# Altium PCB shkb.PcbDoc (part 3 of 3)
Units mil, origin at the board's own origin, x right, y up, seen from the top; angles counter-clockwise.
Board outline 5570.88 x 1417.33 mil, 4 copper layers (COMPONENT, GND1, GND2, SIGNAL), stack 63.78 mil thick; 142 components, 135 nets, 597 pads, 700 vias.
Unrouted connection lines stored in the file: 1.
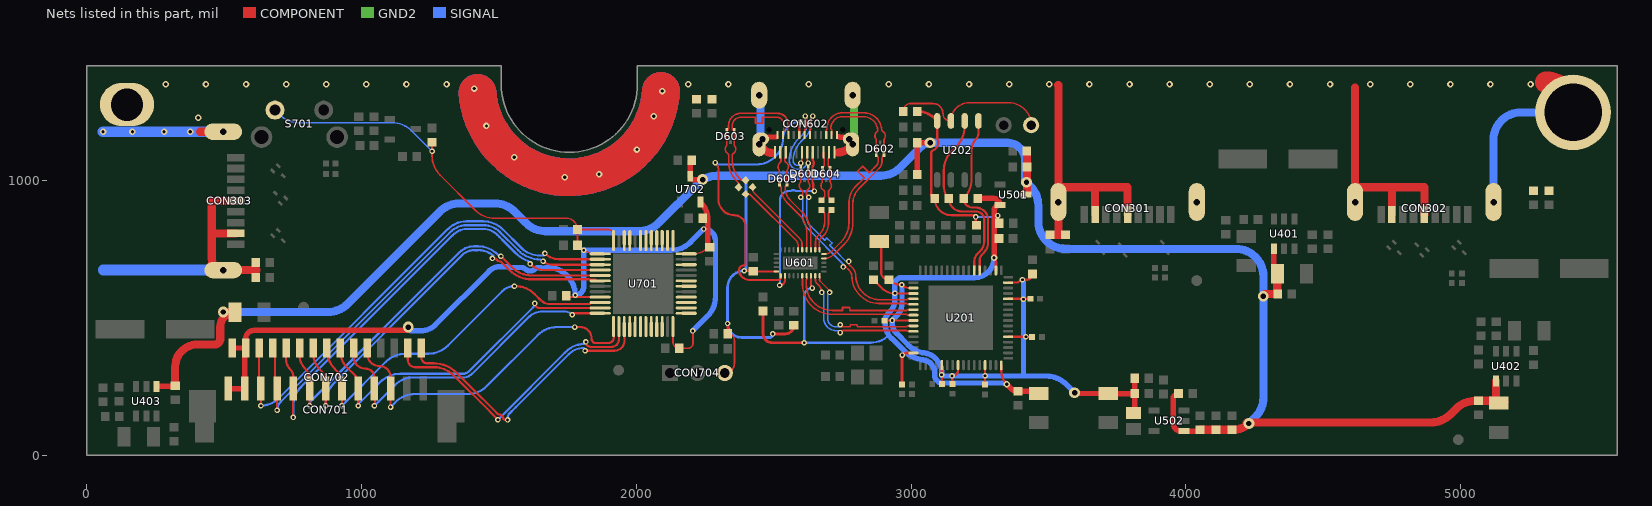
[diagram p5: the nets of this part, all layers, seen from the top]

## Via types
v1: diameter 20, hole 10, COMPONENT to SIGNAL, tented both sides, 543 vias
v2: diameter 23.62, hole 11.81, COMPONENT to SIGNAL, tented both sides, 94 vias
v3: diameter 20, hole 11.81, COMPONENT to SIGNAL, 28 vias
v4: diameter 23.62, hole 11.81, COMPONENT to SIGNAL, tented bottom, 25 vias
v5: diameter 39.37, hole 19.68, COMPONENT to SIGNAL, tented both sides, 10 vias

## Nets (pads, with @x,y where several pads share a name; then routed paths per layer and width w, separated by ;. In a path a pad name is that pad's centre, name@x,y a point inside that pad or via, vN(x,y) a via of type N, cw(c..) or ccw(c..) an arc to the next point about the centre after c; other vN are vias at no path point) (continued)
PA0: CON701.6 CON702.8 U701.10 | length 1344.9
  COMPONENT w8: CON702.8@872.49,389.76 872.49,384.93 ccw(c972.49,384.93) 901.78,314.22 903,313 cw(c841.98,251.98) 928.28,251.98 CON701.6@928.28,242 v1@928.28,181.28 ; v1(1556,615) 1559.58,615 cw(c1559.58,515) 1630.29,585.71 1653,563 ccw(c1685.02,595.02) 1685.02,549.74 1826.56,549.74 ccw(c1826.52,557.74) 1829.62,550.36 cw(c1841.83,538.14) 1841.83,555.42 U701.10@1858.51,555.42
  SIGNAL w8: v1(928.28,180) 1087.99,339.71 cw(c1158.7,269) 1158.7,369 1242.58,369 ccw(c1242.58,469) 1313.29,398.29 1511.62,596.62 cw(c1556,552.23) v1(1556,615)
PA1: CON701.5 CON702.9 U701.11 | length 1274.7
  COMPONENT w8: CON702.9@921.7,389.76 921.7,378.66 ccw(c1004.66,378.66) 946,320 973.57,292.44 cw(c941.13,260) 987,260 v1@987,176 ; v1(1630,552) ccw(c1646.26,552) 1646.26,535.74 U701.11@1858.51,535.74
  SIGNAL w8: v1@987,176 cw(c1028.04,176) 987.82,184.18 cw(c995.65,182.54) 990,188.2 1003.45,201.65 1068.51,266.71 cw(c1139.22,196) 1139.22,296 1367.86,296 ccw(c1367.86,330.14) 1392,306 1624.34,538.34 ccw(c1610.69,552) v1(1630,552)
  other v1: 987.33,180
PA2: CON701.4 CON702.10 U701.12 | length 1213.3
  COMPONENT w8: CON702.10@970.91,389.76 970.91,357.09 ccw(c1013,357.09) 1013,315 cw(c1013,281.61) 1046.39,281.61 CON701.4@1046.39,242 ; v1@1048,174 CON701.4@1048,242 ; v1(1766,511) cw(c1771.05,511) 1771.05,516.05 U701.12@1858.51,516.05
  SIGNAL w8: v1(1046.39,180) 1121.1,254.71 cw(c1191.81,184) 1171.13,281.84 cw(c1172.73,274) 1172.69,282 1367.86,282 ccw(c1367.86,330.14) 1401.95,296.15 1606.4,500.6 ; v1@1048,174 v1@1050.19,176.19 ; 1606.43,500.63 cw(c1660.48,446.52) 1660.48,523 1737.03,523 cw(c1737.03,482.03) v1(1766,511)
PA3: CON701.3 CON702.11 U701.13 | length 1260.2
  COMPONENT w8: CON702.11@1020.13,389.76 1020.13,368.87 ccw(c1065,368.87) 1065,324 cw(c1065,283.56) 1105.44,283.56 CON701.3@1105.44,242 1105,242 v1(1105,175) ; v1(1776,466) 1795,466 cw(c1795,424) 1837,424 1837,423 ccw(c1853,423) 1845.31,408.97 ccw(c1849.13,416) 1849.09,408 1897,408 ccw(c1897,429) 1918,429 1918,456.56 ccw(c1916.58,456.56) U701.13@1916.58,457.98
  SIGNAL w8: v1(1105,175) 1122.71,192.71 cw(c1193.42,122) 1193.42,222 1384.58,222 ccw(c1384.58,322) 1455.29,251.29 1640.71,436.71 cw(c1711.42,366) 1711.42,466 v1(1776,466)
PA4: CON702.14 U701.14 | length 1078.2
  COMPONENT w8: CON702.14@1167.76,389.76 1167.76,347 ccw(c1194.76,347) 1171.79,332.82 ccw(c1194.76,347) 1180.59,324.02 ccw(c1194.76,347) 1194.76,320 1263.4,320 cw(c1263.4,220) 1334.11,290.71 1381.53,243.29 1432.9,192 v1(1496,129) ; v1(1816.06,412) ccw(c1834.06,412) 1834.06,394 1910,394 ccw(c1910,420.26) 1936.26,420.26 U701.14@1936.26,457.98
  SIGNAL w8: v1(1496,129) 1739.5,372.5 1744.07,377.07 cw(c1809.09,312.04) 1809.09,404 cw(c1811.59,404) 1809.82,405.76 v1(1816.06,412)
PA5: CON702.15 U701.15 | length 1056.1
  COMPONENT w8: CON702.15@1216.98,389.76 1216.98,355.02 ccw(c1238,355.02) 1238,334 1263.4,334 cw(c1263.4,220) 1344.11,300.51 1391.4,253.22 1489.38,155.39 1493.67,151.11 ccw(c1499.29,156.81) 1498.3,148.87 cw(c1496,129) 1515.38,133.96 ccw(c1523.11,136) 1523.07,128 v1(1531,128) ; CON702.15@1216.98,401.98 cw(c1220,401.98) CON702.15@1220,405 ; v1(1813,380) 1920,380 ccw(c1920,417) 1957,417 1957,456.93 ccw(c1955.95,456.93) U701.15@1955.95,457.98
  SIGNAL w8: v1(1531,128) 1531,131.86 cw(c1565.14,131.86) 1534.76,147.43 cw(c1541.86,143.75) 1536.17,149.38 1560.9,174.1 1753.97,367.17 cw(c1809.09,312.04) 1809.09,390 1809.09,389.44 ccw(c1822.44,389.44) v1(1813,380)
PA6: U701.16
PA7: U701.17
PA9: U701.30
PA10: U701.31
PA15: U701.38
PB0: U701.18
PB1: U701.19
PB2: U701.20
PB3: U701.39
PB4: U701.40
PB5: U701.41
PB6: U701.42
PB7: U701.43
PB8: U701.45
PB9: U701.46
PB10: U701.21
PB11: U701.22
PB12: U701.25
PB13: U701.26
PB14: U701.27
PB15: U701.28
PC13: CON701.11 CON702.3 U701.2 | length 1751.8
  COMPONENT w8: CON702.3@626.43,389.76 626.43,257.87 ccw(c648.87,257.87) 633,242 v1(633,180) ; v1@1667,734 ccw(c1717.94,784.94) 1717.94,712.9 U701.2@1858.51,712.9
  SIGNAL w8: v1(633,180) ccw(c633,271.74) 656.06,182.94 ccw(c633,271.74) 697.87,206.87 1314.42,823.42 cw(c1381,756.85) 1381,851 1442.58,851 cw(c1442.58,751) 1513.29,821.71 1579.71,755.29 ccw(c1650.42,826) 1650.42,726 v1@1663,726
  other v1: 1667,734
PC14: CON701.10 CON702.4 U701.3 | length 1719.3
  COMPONENT w8: CON702.4@675.64,389.76 cw(c655.62,369.74) 683.93,369.74 683.93,254.92 ccw(c716.33,266.28) CON701.10@692.06,242 v1(692.06,162.94) ; v1(1660,706) ccw(c1690.86,736.86) 1690.86,693.22 U701.3@1858.51,693.22
  SIGNAL w8: v1(692.06,162.94) cw(c736.26,162.94) 705,194.2 1320.51,809.71 cw(c1391.22,739) 1363.06,834.95 cw(c1365.27,827.27) 1363.51,835.07 cw(c1381,756.85) 1381,837 1442.58,837 cw(c1442.58,751) 1503.51,811.7 1569.73,745.47 ccw(c1650.42,826) 1650.42,712
PC15: CON701.9 CON702.5 U701.4 | length 1731.8
  COMPONENT w8: CON702.5@724.85,389.76 724.85,348.57 ccw(c776.57,348.57) 740,312 cw(c713.18,285.18) 750.28,293.05 cw(c713.18,285.18) 751.11,285.18 CON701.9@751.11,242 ; v1@750.28,139.72 CON701.9@750.28,242 ; v1(1613,696) ccw(c1667.25,750.25) 1667.25,673.53 U701.4@1858.51,673.53
  SIGNAL w8: v1(751.11,137) 751.11,179.09 cw(c851.11,179.09) 780.4,249.8 951.3,420.7 1330.36,799.77 cw(c1391.22,739) 1366.5,821.37 cw(c1368.77,813.7) 1367.06,821.52 cw(c1381,756.85) 1381,823 1442.58,823 cw(c1442.58,751) 1493.68,801.72 1500.72,794.68 1518.16,777.24 cw(c1512.52,771.57) 1518.2,777.2 1559.86,735.55 ccw(c1650.42,826) 1606.44,705.79
PF0: CON701.8 CON702.6 U701.5 | length 1540.2
  COMPONENT w8: CON702.6@774.06,389.76 774.06,361.72 ccw(c838.72,361.72) 775.81,346.77 ccw(c838.72,361.72) 793,316 cw(c751.56,274.56) 810.17,274.56 CON701.8@810.17,242 v1@810.17,180 ; v1(1507,724) 1547.86,683.14 ccw(c1618.58,753.85) 1618.58,653.85 U701.5@1858.51,653.85
  SIGNAL w8: v1(810.16,180) cw(c839.53,180) 818.77,200.77 1356.08,738.08 cw(c1409,685.16) 1409,760 1423.58,760 cw(c1423.58,660) 1494.29,730.71 v1@1499,726 ; v1@816,177 v1@816,180
PF1: CON701.7 CON702.7 U701.6 | length 1512.8
  COMPONENT w8: CON702.7@823.28,389.76 823.28,372.1 ccw(c911.1,372.1) 849,310 cw(c800.18,261.18) 869.22,261.18 CON701.7@869.22,242 v1(869.22,180) ; v1(1476,716) cw(c1476,669.64) 1486.63,714.77 cw(c1484.76,706.99) 1491.1,711.87 ccw(c1507,724) 1507.2,704 1538,673.2 ccw(c1618.58,753.85) 1618.58,639.85 1826.56,639.85 cw(c1826.52,631.85) 1829.62,639.22 ccw(c1835.87,653.85) 1835.87,637.94 1849.85,637.94 cw(c1849.85,629.94) 1852,637.64 1852,634.16 U701.6@1858.51,634.16
  SIGNAL w8: v1@869.22,173.22 v1(869.22,180) 869.22,190 cw(c969.22,190) 898.51,260.71 1076.19,438.39 1079.09,441.29 1265.9,628.1 1327.81,690.01 1365.99,728.19 cw(c1409,685.16) 1409,746 1423.58,746 cw(c1423.58,660) 1479.23,725.56
SCL: R203.1 U201.38 U202.6 | length 684.6
  COMPONENT w7.99: U202.6@3195.29,1222.13 ccw(c3254.72,1216.28) 3195,1217 ccw(c3254.72,1216.28) U202.6@3195,1216.28 3195,1195.42 cw(c3095,1195.42) 3165.71,1124.71 3148.29,1107.29 ccw(c3219,1036.58) 3119,1036.58 3119,978.88 ccw(c3182.47,978.88) 3137.59,934 ccw(c3184.59,934) 3184.59,887 3236.01,887 cw(c3236.01,857) 3245.99,885.29 cw(c3236.01,857) 3264.29,866.99 cw(c3236.01,857) 3266,857 3266,777 cw(c3218.23,777) 3252.01,743.22 3240.96,732.17 ccw(c3267.64,705.48) 3229.91,705.48 U201.38@3229.91,671.99
SDA: R202.1 U201.37 U202.5 | length 623.5
  COMPONENT w7.99: U201.37@3249.59,671.99 3249.59,708 cw(c3281,708) 3258.77,730.19 ; 3258.79,730.21 3264.79,736.21 ccw(c3228.09,772.91) 3280,772.91 3280,817
  COMPONENT w8: U202.5@3245,1216.28 3245,1170.31 cw(c3217.69,1170.31) 3237,1151 ccw(c3278.04,1109.96) 3220,1109.96 3220,1004.42 cw(c3120.99,1004.42) R202.1@3191,934.41 ccw(c3224.42,934.41) 3224.42,900.99 3232.58,900.99 3236.01,900.99 cw(c3236.01,857) 3280,857.09 cw(c3236.01,857) 3280,857 3280,837 3280,817
SHELD1: C313.2 C314.2 C315.2 C602.2 CON301.4 CON301.7 CON301.G CON302.4 CON302.7 CON302.G CON303.4 CON303.7 CON303.G CON602.A1 CON602.A12 CON602.B1 CON602.B12 CON602.G L304.2 L305.2 L306.2 L602.2 pad. | length 6763.4
  COMPONENT w19.68: CON602.G@2459.01,1150.47 cw(c2477.18,1132.3) 2477.18,1158 2508,1158
  COMPONENT w20: 2737,1158 cw(c2737,1102.49) 2776.25,1141.74 CON602.G@2787.09,1130.91
  COMPONENT w29.53: 411,1177.17 CON303.G@496.06,1177.17 ; CON303.4@541.34,807.09 454,807.09 ; CON303.7@541.34,925.2 454,925.2 454,807.09 ; 617,674 cw(c616.23,674) 616.23,673.23 CON303.G@496.06,673.23 cw(c496.06,715.29) 454,715.29 454,807.09 ; CON602.G@2446.93,1130.91 2467.11,1110.72 ccw(c2493,1136.61) 2493,1100 ; L304.2@3505,801.59 C314.2@3562,801.59 ; 3535,1347 cw(c3535,1345.98) 3536.02,1345.98 CON301.G@3536.02,975 ; 3536.02,803.63 CON301.G@3536.02,921.26 CON301.G@3536.02,975 ; CON301.4@3669.88,875.98 3669.88,975 ; CON301.7@3787.99,875.98 3787.99,975 3669.88,975 ; 4616,1338 4616.14,1337.86 CON302.G@4616.14,921.26 ; CON302.G@4616.14,975 4750,975 ; CON302.4@4750,875.98 4750,975 ; CON302.7@4868.11,875.98 4868.11,975 4750,975 ; CON302.G@5120.08,921.26 CON302.G@5120.08,928.08 ; CON301.G@3536.02,975 3669.88,975
  COMPONENT w29.68: 2734,1102 ccw(c2734,1160.38) 2775.28,1119.1 CON602.G@2787.09,1130.91
  COMPONENT w78.74: 5309.75,1357.28 cw(c5309.75,1257.28) 5409.75,1257.28 pad.@5409.75,1247.47
  COMPONENT w137.8: 1421.54,1317.88 ccw(c1755,1346) v2@2089.01,1325.31
  GND2 w29.53: CON602.G@2787.09,1310.04 cw(c2774.92,1297.87) 2792.13,1297.87 CON602.G@2792.13,1144.69
  SIGNAL w29.53: CON602.G@2451.97,1144.69 CON602.G@2451.97,1323.82 ; CON302.G@5120.08,935.04 5120.08,1147.47 cw(c5220.08,1147.47) 5220.08,1247.47 pad.@5409.75,1247.47
  SIGNAL w39.37: v2(58.5,1177.17) v2(165.5,1177.17) v2(280.5,1177.17) v2(375.5,1177.17) CON303.G@496.06,1177.17 ; 59.06,674.02 CON303.G@496.62,674.02
  SIGNAL w137.8: 1421.54,1317.88 ccw(c1755,1346) v2@2089.01,1325.31
  other v2: 1739,1011 1864,1022 1555,1084 2002,1112 1454,1198 405,1228 2063,1233 2094,1325 1410,1334 287,1350 433,1350 579,1350 725,1350 871,1350 1017,1350 1163,1350 1309,1350 2189,1350 2335,1350 2627,1350 2919,1350 3065,1350 3211,1350 3357,1350 3503,1350 3649,1350 3795,1350 3941,1350 4087,1350 4233,1350 4379,1350 4525,1350 4671,1350 4817,1350 4963,1350 5109,1350 5255,1350
SWCLK: U701.37
SWDIO: U701.34
UP_CC1: CON602.A5 U601.2 | length 647.8
  COMPONENT w8: v1(2521,618) ccw(c2521,637.88) 2540.88,637.88 U601.2@2540.88,652.76 ; CON602.A5@2641.81,1102.36 2641.81,1077.38 ccw(c2649.81,1077.38) 2642.95,1073.27 cw(c2625.79,1063) 2642.15,1051.51 ccw(c2648.7,1046.91) 2640.7,1046.91 2640.7,1042 2640.7,994.45 ccw(c2648.03,997.66) 2640.82,994.19 cw(c2611.98,980.31) 2642.23,990.77 cw(c2611.98,980.31) 2642.25,990.72 cw(c2611.98,980.31) 2643.07,972.73 ccw(c2650.84,970.84) 2643.45,967.79 ccw(c2662.94,975.94) v1@2648,961
  SIGNAL w8: v1(2521,618) ccw(c2521,620) 2523,620 2523,929 cw(c2555,929) 2555,961 2558.39,961 ccw(c2558.39,969) 2561.99,961.86 cw(c2571,944) 2576.32,963.28 cw(c2571,944) 2580.01,961.86 ccw(c2583.61,969) 2583.61,961 2605.79,961 cw(c2605.83,953) 2607.55,960.81 ; 2607.59,960.8 ccw(c2611.98,980.31) 2615.49,960.62 ; 2615.49,960.63 ccw(c2611.98,980.31) 2616.38,960.8 cw(c2618.14,953) 2618.18,961 v1(2648,961)
UP_CC2: CON602.B5 U601.1 | length 1100
  COMPONENT w8: v1@2287,1065 cw(c2258.68,1036.68) 2295,1053.56 cw(c2258.68,1036.68) 2298.73,1036.68 2298.73,930.8 ccw(c2356.54,930.8) 2356.54,873 cw(c2356.54,832.2) 2397.34,832.2 2397.34,696.48 cw(c2391.83,696.48) 2392.33,690.99 ccw(c2393,671) 2391.83,690.97 ccw(c2393,671) 2373.12,673.21 ccw(c2393,671) 2373.1,672.99 ccw(c2393,671) 2373.63,666.01 ccw(c2393,671) 2376.5,659.69 ccw(c2415,681) 2415,637 2513.58,637 ccw(c2513.58,645) 2515.67,637.28 ; 2515.7,637.29 cw(c2521,618) 2518.25,637.81 ccw(c2517.16,645.73) 2525.13,645.13 U601.1@2525.13,652.76 ; CON602.B5@2592.6,1165.35 2592.6,1200.96 cw(c2611.04,1200.96) v1@2598,1214
  SIGNAL w8: v1(2287,1065) ccw(c2294,1065) 2294,1058 2436.77,1058 ccw(c2436.77,1155.22) 2499.85,1081.24 ccw(c2436.77,1155.22) 2533.99,1155.22 cw(c2597,1150.84) 2597,1214 v1(2598,1214)
UP_D_N: CON602.A7 CON602.B7 D601.2 U201.54 | length 1095.3
  COMPONENT w6: 2598.17,1015.05 ccw(c2592.22,1015.84) 2598.22,1015.87 D601.2@2598.22,1039.74 ; D601.2@2598.22,1043.31 D601.2@2598.22,1039.74 ; v1(2598.23,1062.99) ccw(c2588.06,1073.16) 2602.44,1073.16 CON602.A7@2602.44,1102.36 ; D601.2@2599.67,1036.94 2599.18,1037.43 cw(c2601.5,1039.74) D601.2@2598.22,1039.74 ; 2605.17,946 2605.17,961.24 ccw(c2602.89,961.24) 2604.51,962.85 cw(c2611.98,980.31) 2597.89,967.57 cw(c2611.98,980.31) 2596.86,991.81 ccw(c2592.08,995.44) 2598.08,995.47 2598.08,1003.94 2598.08,1013.78 ; CON602.B7@2631.97,1165.35 2632.85,1166.23 2632.85,1183.91 ccw(c2626.53,1190.22) 2635.46,1190.22 2635.46,1191.76 2635.5,1191.79 2635.5,1219 cw(c2646.89,1219) 2638.84,1227.06 2639.32,1227.54 ccw(c2632.85,1234.01) v1(2642,1234.01) ; v1(2753,685) 2763.1,685 2773.05,675.05 cw(c2744.2,646.2) 2785,646.2 ccw(c2869.18,646.2) 2809.64,586.69 ; 2809.66,586.67 2818.86,577.47 ccw(c2880.82,639.42) 2818.96,577.37 ccw(c2880.82,639.42) 2880.69,551.81 ccw(c2880.82,639.42) 2880.82,551.8 2983.91,551.81 2986.75,548.96 U201.54@3008.45,548.96 ; 2598.08,1013.78 cw(c2607.08,1013.78) 2598.16,1015.01 ccw(c2607.08,1013.78) 2598.08,1013.78
  SIGNAL w6: v1(2598,939) cw(c2598,931.5) 2605.5,931.5 2605.5,869.49 ccw(c2670.41,869.49) 2624.48,823.62 2753,695.1 v1(2753,685) ; v1(2598.23,1062.99) cw(c2589.08,1062.99) 2595.55,1056.52 cw(c2591.3,1060.76) 2591.3,1054.76 2586.65,1054.76 cw(c2586.65,1070.42) 2571,1070.42 2571,1071.58 cw(c2671,1071.58) 2600.29,1142.29 2614.78,1156.78 ccw(c2564.77,1206.8) 2635.5,1206.8 2635.5,1218.32 cw(c2657.69,1218.32) v1@2642,1234.01
UP_D_P: CON602.A6 CON602.B6 D601.1 U201.53 | length 1171.8
  COMPONENT w6: CON602.B6@2612.28,1165.35 2612.28,1183.03 cw(c2617.14,1183.03) 2613.7,1186.46 2617.14,1189.89 2617.27,1189.89 ccw(c2607.07,1200.09) 2621.5,1200.09 2621.5,1219 ccw(c2610.13,1219) 2618.17,1227.04 2617.68,1227.53 cw(c2624.15,1234) v1(2615,1234) ; 2619.17,946 2619.17,961.4 cw(c2621.45,961.4) 2619.84,963.02 ccw(c2611.98,980.31) 2626.11,967.6 ccw(c2611.98,980.31) 2627.14,991.78 cw(c2631.92,995.4) 2625.92,995.4 2625.92,1003.94 2625.92,1013.78 ccw(c2616.92,1013.78) 2625.84,1015.01 ; CON602.A6@2622.13,1102.36 2622.13,1071.84 ccw(c2634.63,1071.84) v1(2625.79,1063) ; D601.1@2624.33,1036.94 2624.82,1037.43 ccw(c2622.5,1039.74) 2625.78,1039.74 D601.1@2625.78,1043.31 2625.78,1015.84 ccw(c2631.78,1015.84) 2625.83,1015.05 ; v1(2773,705) 2773,694.9 2787.05,680.85 cw(c2758.2,652) 2799,652 ccw(c2883.18,652) 2823.66,592.47 2826.47,589.66 ccw(c2884.06,647.25) 2826.57,589.56 ccw(c2884.06,647.25) 2883.93,565.81 ccw(c2884.06,647.25) 2884.06,565.8 2983.91,565.81 2986.75,568.65 U201.53@3008.45,568.65
  SIGNAL w6: 2558.72,1091.28 ccw(c2671,1071.58) 2557,1071.58 ; v1@2615,1234 cw(c2599.31,1218.31) 2621.5,1218.31 2621.5,1206.89 cw(c2564.55,1206.89) 2604.82,1166.61 2590.28,1152.08 ccw(c2670.63,1071.73) 2557,1071.73 2557,1071.58 ; v1(2625.79,1063) 2609,1046.21 cw(c2595.85,1059.35) 2595.85,1040.76 ccw(c2594.38,1034.95) 2593.67,1040.9 cw(c2591.3,1060.76) 2591.38,1040.76 cw(c2591.3,1060.76) 2591.3,1040.76 2586.58,1040.76 cw(c2586.65,1070.42) 2560.76,1055.96 cw(c2586.65,1070.42) 2557,1070.42 2557,1071.58 ; v1(2627,939) ccw(c2627,931.5) 2619.5,931.5 2619.5,869.63 ccw(c2670.77,869.63) 2634.48,833.42 ; v1(2773,705) 2762.9,705 2724.45,743.45 2722.33,745.57 2703.94,763.96 2711.8,771.82 2693.42,790.2 2685.56,782.34 2666.95,800.95 2644.41,823.48 2639.47,828.43 2634.52,833.38 ; 2634.48,833.42 ccw(c2670.77,869.63) 2634.52,833.38
UP_SSRX1_N: CON602.B10 D602.2 U601.14 | length 856.3
  COMPONENT w6: U601.14@2682.61,715.75 ccw(c2682.61,769.61) 2720.69,731.51 2754.67,765.49 ccw(c2674.21,845.96) 2788,845.96 2788,916 cw(c2865.74,916) 2810.77,970.97 2883.23,1043.44 ccw(c2856.71,1069.96) 2894.22,1069.96 2894.22,1080.49 cw(c2904.6,1080.49) 2897.26,1087.83 cw(c2898.41,1086.69) 2898.41,1088.31 ccw(c2898.41,1089.93) 2899.55,1088.78 2900.04,1089.27 ccw(c2897.72,1091.59) 2901,1091.59 D602.2@2901,1095.15 2901,1122.62 cw(c2907,1122.62) 2901.06,1123.44 ccw(c2892.14,1124.68) 2901.14,1124.68 2901.14,1132.75 cw(c2907.14,1132.75) 2901.17,1133.28 ccw(c2887.22,1134.52) 2901.22,1134.52 2901.22,1149.45 ccw(c2887.22,1162.3) 2896.09,1179.1 cw(c2898.89,1184.41) 2892.9,1184.07 ccw(c2827.4,1180.4) 2827.4,1246 2749.87,1246 ccw(c2749.87,1190) 2693.87,1190 2693.87,1189.89 cw(c2689.01,1189.89) 2692.44,1186.46 ccw(c2695.88,1183.03) 2691.02,1183.03 CON602.B10@2691.02,1165.35
UP_SSRX1_P: CON602.B11 D602.1 U601.15 | length 856.3
  COMPONENT w6: U601.15@2682.61,731.5 ccw(c2682.61,775.58) 2713.78,744.4 2744.71,775.33 ccw(c2674,846.04) 2774,846.04 2774,921.8 cw(c2851.74,921.8) 2796.77,976.77 2827,1007 2829.12,1009.12 2804.99,1033.25 2823.38,1051.64 2847.51,1027.51 2857.5,1037.5 2866,1046 2873.31,1053.31 ccw(c2856.61,1070) 2880.22,1070 2880.22,1080.49 ccw(c2869.84,1080.49) 2877.18,1087.83 ccw(c2876.03,1086.69) 2876.03,1088.31 cw(c2876.03,1089.93) 2874.89,1088.78 2874.4,1089.27 cw(c2876.72,1091.59) 2873.44,1091.59 D602.1@2873.44,1095.15 2873.44,1122.62 ccw(c2867.44,1122.62) 2873.39,1123.42 cw(c2882.3,1124.68) 2873.3,1124.68 2873.3,1132.74 ccw(c2867.3,1132.74) 2873.27,1133.31 cw(c2887.22,1134.52) 2873.22,1134.52 2873.22,1149.45 cw(c2887.22,1162.3) 2876.32,1177.86 ccw(c2872.88,1182.78) 2878.88,1182.78 ccw(c2872.88,1182.78) 2878.87,1183.16 ccw(c2826.43,1179.43) 2826.43,1232 2749.97,1232 ccw(c2749.97,1189.89) 2707.87,1189.89 ccw(c2712.72,1189.89) 2709.29,1186.46 cw(c2705.86,1183.03) 2710.71,1183.03 CON602.B11@2710.71,1165.35
UP_SSRX2_N: CON602.A10 D605.2 U601.18 | length 395.9
  COMPONENT w6: CON602.A10@2543.39,1102.36 2543.39,1084.69 cw(c2538.53,1084.69) 2541.96,1081.26 ccw(c2545.4,1077.82) 2540.54,1077.82 2540.54,1071.56 ccw(c2546.54,1071.56) 2540.58,1070.87 ccw(c2546.54,1071.56) 2543.64,1066.31 cw(c2534.43,1049.69) 2549.56,1038.19 ccw(c2554.34,1034.56) 2548.34,1034.56 2548.34,1016.22 cw(c2539.34,1016.22) 2548.25,1014.99 ccw(c2554.2,1014.16) 2548.2,1014.16 2548.2,992.6 D605.2@2548.2,986.69 2548.2,983.13 cw(c2544.92,983.13) 2547.24,980.81 2546.75,980.33 cw(c2545.6,981.47) 2545.6,979.85 ccw(c2545.6,978.23) 2544.46,979.38 ccw(c2551.8,972.04) 2541.42,972.04 ccw(c2602.87,972.04) 2542.04,963.31 ccw(c2602.87,972.04) 2559.42,928.58 2601.21,886.79 cw(c2520.87,806.44) 2634.5,806.44 2634.5,749.35 ccw(c2637.48,749.35) U601.18@2635.37,747.24
UP_SSRX2_P: CON602.A11 D605.1 U601.19 | length 394.9
  COMPONENT w6: 2520.58,1014.96 cw(c2514.64,1014.16) 2520.64,1014.13 D605.1@2520.64,986.69 2520.64,983.13 ccw(c2523.92,983.13) 2521.6,980.81 2522.08,980.33 ccw(c2523.23,981.47) 2523.23,979.85 cw(c2523.23,978.23) 2524.38,979.38 cw(c2517.04,972.04) 2527.42,972.04 2527.42,971.95 ccw(c2602.65,971.95) 2549.43,918.77 2591.21,876.99 cw(c2520.5,806.28) 2620.5,806.28 2620.5,749.35 cw(c2617.51,749.35) U601.19@2619.62,747.24 ; 2520.58,1014.99 cw(c2529.5,1016.22) 2520.5,1016.22 2520.5,1034.6 ccw(c2514.5,1034.6) 2519.8,1037.4 ccw(c2514.5,1034.6) 2519.26,1038.25 cw(c2534.43,1049.69) 2523.9,1065.5 ccw(c2520.54,1070.47) 2526.54,1070.47 ; CON602.A11@2523.7,1102.36 2523.7,1084.69 ccw(c2528.55,1084.69) 2525.12,1081.26 cw(c2521.69,1077.82) 2526.54,1077.82 2526.54,1070.51
UP_SSRX_N: U201.58 U601.10 | length 524.4
  COMPONENT w6: U601.10@2666.87,652.76 2666.87,639.91 2665.99,639.04 ccw(c2673.33,639.04) 2668.13,633.86 2703,598.99 v1(2703,592) ; v1(2742,474) 2748.62,467.38 2775,467.38 2778,467.38 2778,474.48 2804,474.48 2804,467.38 2836,467.38 2857,467.38 2983.91,467.38 2986.75,470.22 U201.58@3008.45,470.22
  SIGNAL w6: v1(2703,592) 2696,585 2696,497.6 ccw(c2726.6,497.6) 2700.6,481.47 ccw(c2726.6,497.6) 2726.6,467 2735,467 v1(2742,474)
UP_SSRX_P: U201.59 U601.9 | length 525
  COMPONENT w6: U601.9@2651.12,652.76 2651.12,639.91 2651.99,639.04 2651.99,634.62 ccw(c2662.66,634.62) 2655.11,627.08 2664.26,617.94 cw(c2638.32,592) v1(2675,592) ; v1(2742,446) 2749,453 2750.7,453 2751.08,453.38 2983.91,453.38 2986.75,450.54 U201.59@3008.45,450.54
  SIGNAL w6: v1(2675,592) 2682,585 2682,497.6 ccw(c2726.6,497.6) 2683,488.2 ccw(c2726.6,497.6) 2717.2,454 ccw(c2726.6,497.6) 2726.6,453 2735,453 v1(2742,446)
UP_SSTX1_N: C604.2 U601.17 | length 159.6
  COMPONENT w6: U601.17@2651.12,747.24 ccw(c2649.01,749.35) 2651.99,749.35 2651.99,776.64 cw(c2684.22,776.64) 2661.43,799.43 2668.22,806.22 ccw(c2627.62,846.81) 2668.29,806.29 ccw(c2627.62,846.81) 2685.03,846.81 2685.03,875.97 ccw(c2673.03,875.97) 2681.52,884.46 2681.2,884.46 C604.2@2673.37,892.28
UP_SSTX1_P: C603.2 U601.16 | length 160.3
  COMPONENT w6: U601.16@2666.87,747.24 2666.51,747.6 2666.51,754.83 2665.99,755.35 2665.99,776.55 cw(c2684.44,776.55) 2671.39,789.6 2682.22,800.42 ccw(c2641.62,841.01) 2682.29,800.49 ccw(c2641.62,841.01) 2699.03,841.01 2699.03,875.97 cw(c2711.03,875.97) 2702.55,884.46 2702.87,884.46 C603.2@2710.69,892.28
UP_SSTX1_PRE_N: C604.1 CON602.A3 D604.2 | length 188.9
  COMPONENT w6: C604.1@2673.37,927.72 2681.2,935.54 2681.52,935.54 ccw(c2673.03,944.03) 2685.03,944.03 2685.03,958.36 ccw(c2679.03,958.36) 2681.91,963.62 cw(c2690.98,980.31) 2672.7,985.49 cw(c2690.98,980.31) 2675.88,991.85 ccw(c2671.08,995.44) 2677.08,995.47 2677.08,1013.78 2677.08,1040.29 2677.22,1040.43 D604.2@2677.22,1043.31 2677.22,1046.18 cw(c2682.16,1046.18) 2678.67,1049.67 cw(c2679.81,1048.53) 2679.81,1050.15 ccw(c2679.81,1051.77) 2680.96,1050.62 2682.24,1051.91 ccw(c2678,1056.15) 2684,1056.15 2684,1072.98 2684.02,1077.82 ccw(c2679.17,1077.82) 2682.6,1081.26 cw(c2686.03,1084.69) 2681.18,1084.69 CON602.A3@2681.18,1102.36
UP_SSTX1_PRE_P: C603.1 CON602.A2 D604.1 | length 187.8
  COMPONENT w6: CON602.A2@2700.87,1102.36 2700.87,1084.69 cw(c2696.01,1084.69) 2699.44,1081.26 ccw(c2702.88,1077.82) 2698.02,1077.82 2698.02,1059.02 2698,1056.15 ccw(c2704,1056.15) 2699.75,1051.92 2701.04,1050.62 ccw(c2702.19,1051.77) 2702.19,1050.15 cw(c2702.19,1048.53) 2703.33,1049.67 cw(c2699.84,1046.18) 2704.78,1046.18 D604.1@2704.78,1043.31 2704.78,1040.43 2704.92,1040.29 2704.92,1013.78 2704.92,995.4 ccw(c2710.92,995.4) 2706.14,991.78 cw(c2690.98,980.31) 2709.58,984.21 cw(c2690.98,980.31) 2701.66,964.6 ccw(c2705.03,959.63) 2699.03,959.63 2699.03,944.03 ccw(c2711.03,944.03) 2702.55,935.54 2702.87,935.54 C603.1@2710.69,927.72
UP_SSTX2_N: C605.2 U601.21 | length 289.8
  COMPONENT w6: C605.2@2397.17,950.15 2407.43,950.15 cw(c2407.43,937.33) 2416.49,946.4 2579.87,783.01 cw(c2557.82,760.96) 2589,760.96 2589,749.35 cw(c2586.02,749.35) U601.21@2588.13,747.24
UP_SSTX2_P: C606.2 U601.20 | length 300.8
  COMPONENT w6: C606.2@2422.61,975.62 2422.61,971.22 ccw(c2449.52,971.22) 2430.49,952.19 2430.58,952.1 2433.34,949.34 2593.87,788.81 cw(c2571.82,766.76) 2603,766.76 2603,749.35 ccw(c2605.98,749.35) U601.20@2603.87,747.24
UP_SSTX2_PRE_N: C605.1 CON602.B3 D603.2 | length 584.7
  COMPONENT w6: C605.1@2372.12,975.2 2372.12,985.18 ccw(c2358.66,985.18) 2368.18,994.69 2364.24,998.63 cw(c2437.48,1069.59) 2338.68,1044.39 cw(c2437.48,1069.59) 2335.52,1069.59 2335.52,1092.56 ccw(c2329.52,1092.6) 2332.64,1097.72 cw(c2342.52,1113.95) 2327.55,1125.65 ccw(c2322.82,1129.34) 2328.73,1130.36 cw(c2337.6,1131.89) 2328.6,1131.89 2328.6,1181.1 D603.2@2328.74,1181.1 ccw(c2328.74,1187.36) 2335,1187.36 2335,1199 cw(c2380,1199) 2380,1244 2510.43,1244 cw(c2510.43,1199) 2546.05,1226.49 ; 2516.22,1244 cw(c2516.22,1209.84) 2546.05,1226.49 ; CON602.B3@2553.23,1165.35 2553.23,1176.18 2550.39,1179.02 2550.39,1209.84 ccw(c2516.22,1209.84) 2546.05,1226.49
UP_SSTX2_PRE_P: C606.1 CON602.B2 D603.1 | length 546.2
  COMPONENT w6: D603.1@2352.56,1188.42 ccw(c2353.71,1189.57) 2353.71,1187.94 cw(c2353.71,1186.32) 2354.85,1187.47 2355.34,1186.98 cw(c2353.02,1184.66) 2356.3,1184.66 D603.1@2356.3,1181.1 ; C606.1@2397.55,1000.68 2384.64,1000.68 cw(c2384.64,1007.08) 2380.11,1002.55 2378.24,1004.43 2375.29,1007.39 cw(c2437.48,1069.59) 2374.77,1007.91 cw(c2437.48,1069.59) 2349.52,1069.59 2349.52,1092.6 cw(c2355.52,1092.6) 2352.4,1097.72 ccw(c2342.52,1113.95) 2357.49,1125.65 cw(c2362.22,1129.34) 2356.31,1130.36 ccw(c2347.44,1131.89) 2356.44,1131.89 2356.44,1180.96 D603.1@2356.3,1181.1 ; CON602.B2@2533.54,1165.35 2533.54,1176.18 2536.39,1179.02 2536.39,1204.04 ccw(c2510.43,1204.04) 2510.43,1230 2481.71,1230 2459.25,1230 2459.25,1207.92 2433.25,1207.92 2433.25,1230 2404.25,1230 2393.5,1230 2380,1230 ccw(c2380,1199) 2349,1199 2349,1188.4 ccw(c2356.3,1188.4) D603.1@2356.3,1181.1
UP_SSTX_N: U201.55 U601.7 | length 499
  COMPONENT w6: U601.7@2619.62,652.76 2619.62,639.91 2618.75,639.04 2618.75,621.01 ccw(c2713.32,621.01) 2713.32,526.44 2717.65,526.44 2750,526.44 2750,537.43 2776,537.43 2776,526.44 2805,526.44 2983.91,526.44 2986.75,529.28 U201.55@3008.45,529.28
UP_SSTX_P: U201.56 U601.6 | length 499
  COMPONENT w6: U601.6@2603.87,652.76 2603.87,639.91 2604.75,639.04 2604.75,621.01 ccw(c2713.32,621.01) 2713.32,512.44 2983.91,512.44 2986.75,509.59 U201.56@3008.45,509.59
VCC1V1: C205.2 C206.2 C207.2 C208.2 C209.2 C210.2 C211.2 C212.2 C217.2 C506.2 C507.2 L501.2 R502.1 U201.5 U201.8 U201.13 U201.21 U201.28 U201.31 U201.51 U201.57 | length 2577.3
  COMPONENT w7.99: C212.2@2874.02,773.86 cw(c2874.02,756.87) 2891,756.87 2891,665.85 ccw(c2919.02,665.85) C210.2@2919.02,637.83 ccw(c2962.07,680.89) 2962.07,620 v1(2965.94,620) ccw(c2994.87,648.93) 2994.87,608.02 U201.51@3008.45,608.02
  COMPONENT w8: C207.2@2902,490 v1(2931,490) 3008.36,490 U201.57@3008.45,489.91 ; U201.5@3111.8,327.51 3111.8,292.8 v1(3111,292) 3112.43,290.57 C209.2@3112.43,258.72 C209.2@3112.43,257 ; v1(3149,288) cw(c3149,287) v1@3149.95,287.31 ; C208.2@3150,258.72 3150,287 ccw(c3149,287) v1@3149.95,287.31 ; U201.8@3170.85,327.51 3170.85,309.14 cw(c3149,309.14) v1@3149.95,287.31 ; C217.2@3269,256.72 v1(3269,288.72) 3269,327.23 U201.13@3269.28,327.51 ; U201.21@3352.94,430.85 3353.09,431 v1(3418,431) ; U201.31@3352.94,627.7 3378.14,627.7 ccw(c3378.14,662.86) 3402.98,637.98 3420.57,637.98 ccw(c3420.57,659.41) C211.2@3442,659.41 ; 3400.94,430 C205.2@3440.28,430 ; v1(3409,567) 3407.35,568.65 U201.28@3352.94,568.65 3353.29,569 C206.2@3434.28,569
  COMPONENT w19.68: v5(3595,227) ccw(c3597.85,227) 3597.85,224.15 C507.2@3718,224.15 3718,224 C506.2@3813.41,224 ; R502.1@3813.41,280 C506.2@3813.41,224 ; C506.2@3814.41,224 C506.2@3813.41,224 ; L501.2@3815,151.53 cw(c3815,153.12) 3813.41,153.12 C506.2@3813.41,224
  SIGNAL w19.68: 2945.9,443.97 cw(c2981.99,479.99) 2931.32,474.29 cw(c2981.99,479.99) 2931,479.99 v1(2931,490) 2931,490.22 2948.92,508.14 ; 2945.94,443.94 2989.58,400.29 ccw(c3060.29,471) 3050.66,371.46 ; 2948.93,508.15 ccw(c2905.66,551.41) 2966.84,551.41 v1@2966.84,616.79 ; 3042,373 ccw(c3048.62,391.54) 3045.68,372.07 ccw(c3060.29,471) 3050.53,371.48 cw(c3046.18,326.32) 3050.66,371.46 ; 3409,291 v1(3409,567) v1@3409,635.75 ; v5(3595,227) 3563.29,258.71 ccw(c3492.58,188) 3492.58,288 v1(3149,288) 3115,288 cw(c3115,292) 3111,292 cw(c3130.64,293.34) 3110.97,294.08 ccw(c3065.63,295.78) 3111,295.69 ccw(c3065.63,295.78) 3111,295.88 3111,305.49 ccw(c3065.63,305.59) 3111,305.69 ccw(c3065.63,305.59) 3109.48,317.23 ccw(c3036.61,297.85) 3060.72,369.29 ccw(c3046.18,326.32) 3050.66,371.46
  other v1: 3405,638
VCC3V3: C204.2 C213.2 C214.2 C215.2 C216.2 C503.2 R201.1 R202.2 R203.2 R215.1 R602.2 U201.16 U201.34 U201.52 U201.63 U202.8 U501.2 U601.8 | length 3507.3
  COMPONENT w8: U601.8@2635.37,652.76 2635.37,612.63 v1(2640,608) ; C215.2@2862.91,637.83 2892.77,607.98 ccw(c2941,656.21) 2941,588 3008.12,588 U201.52@3008.45,588.33 ; U201.63@2990.6,371.8 U201.63@3008.45,371.8 ; U202.8@3095,1216.28 3095,1153.25 ccw(c3103,1153.25) 3095.76,1149.85 cw(c3069,1137) 3078.45,1108.86 ccw(c3081,1101.28) 3073,1101.28 3073,1015 3073,947.41 ccw(c3086.41,947.41) 3086.41,934 ccw(c3147.41,934) 3147.41,873 3229,873 v1(3235,867) 3235,839.61 R201.1@3238,836.61 ; U201.16@3328.33,326.52 3328.33,305.48 ccw(c3395.48,305.48) 3331.79,284.21 ccw(c3395.48,305.48) v2@3348,258
  COMPONENT w10: R602.2@2461,524.41 2461,442 ccw(c2494,442) 2494,409 v1(2611,409) ; C213.2@2967,256 C213.2@2967,257.72 2967,363 v1(2968,364) cw(c2986.82,345.18) 2986.82,371.8 U201.63@2990.6,371.8 ; R215.1@3022.59,1251 cw(c3022.59,1160) 3086.94,1224.35 U202.8@3095,1216.28 ; v2(3302,718) cw(c3285.95,701.95) 3308.65,701.95 U201.34@3308.65,671.99
  COMPONENT w19.68: R202.2@3242.18,934.41 3299.94,934.41 cw(c3299.94,910.6) U501.2@3323.76,910.6 ccw(c3323.76,888.84) 3302,888.84 v2(3302,718) ; v2(3348,258) 3362.39,243.61 ccw(c3389,270.23) C214.2@3389,232.59 3455.56,232.59 C204.2@3464,224.15
  SIGNAL w8: v1(2640,608) ccw(c2640,579) 2611,579 v1(2611,409) 2852.92,409 ccw(c2852.92,502.37) 2918.95,436.35 ; v1(3235,867) 3310,867 v1(3315,872)
  SIGNAL w19.68: 2905.16,483 cw(c2956.24,483) 2905.23,485.8 ccw(c2885.58,486.88) 2905.22,488.23 cw(c2931,490) 2905.16,490 cw(c2931,490) 2909.81,504.8 ccw(c2893.67,516.07) 2911.08,506.87 cw(c2956.24,483) 2920.12,519.12 2923.08,522.08 ccw(c2879.81,565.34) 2941,565.34 v1(2941,589) 2940.1,589.9 2940.1,610.3 cw(c2959.74,608.92) 2940.13,610.67 2940.33,612.95 ccw(c2920.73,614.69) 2940.28,616.99 cw(c2965.94,620) 2940.1,620 cw(c2965.94,620) 2947.66,638.26 ; 2905.19,482.97 ccw(c2988.75,482.97) 2905.32,478.39 ccw(c2988.75,482.97) 2905.33,478.16 cw(c2885.68,477.03) 2905.35,477.63 ccw(c2981.99,479.99) 2918.95,436.35 ccw(c2981.99,479.99) 2927.77,425.78 2978.77,374.77 cw(c2969.72,357.29) 2981.98,372.69 ccw(c3060.29,471) 3036.61,347.57 ccw(c3060.29,471) 3048.09,345.91 cw(c3046.18,326.32) 3048.15,345.9 cw(c3046.18,326.32) 3052.53,344.95 cw(c3036.61,297.85) 3084.67,310.59 cw(c3065.63,305.59) 3085.32,305.65 cw(c3065.63,305.59) 3085.32,305.53 3085.31,295.85 cw(c3065.63,295.78) 3085.32,295.72 cw(c3065.63,295.78) 3085.25,294.15 ccw(c3111,292) 3086.33,284.31 ccw(c3115,292) 3115,262.31 3145.15,262.31 cw(c3145.22,242.63) 3146.85,262.25 ccw(c3149,288) 3151.15,262.25 cw(c3152.78,242.63) 3151.21,262.25 cw(c3152.78,242.63) 3152.85,262.32 3335.7,262.31 cw(c3335.7,242.63) v2@3348,258 ; 2947.69,638.29 cw(c2965.94,620) 2967.19,645.81 ccw(c2968.13,665.47) 2970.16,645.89 2970.98,645.98 3230,646 ccw(c3230,718) v2(3302,718)
VCC3V3_MCU: C703.2 C704.2 C705.2 C706.2 C707.2 C709.2 CON701.12 CON701.13 CON702.1 CON702.2 R701.1 S701.2 U701.1 U701.9 U701.24 U701.36 U701.48 U702.2 | length 4900.2
  COMPONENT w6: R701.1@1256,1139.41 1256,1090.42 ccw(c1356,1090.42) 1285.29,1019.71 1413.71,891.29 ccw(c1484.42,962) 1484.42,862 1744.59,862 cw(c1744.59,821) C706.2@1785.59,821 ; U701.1@1858.51,732.59 1858.43,732.59 cw(c1858.43,832.59) 1787.72,761.88 C704.2@1785.59,764 C706.2@1785.59,821 ; U701.48@1915.61,803.64 ccw(c1898.25,803.64) 1914.42,809.95 ccw(c1898.25,803.64) 1898.25,821 C706.2@1785.59,821 ; U701.24@2133.11,457.98 2133.11,411.48 ccw(c2155.59,411.48) C703.2@2155.59,389 2188,389 ccw(c2188,407) 2206,407 v1@2206,452 ; U701.36@2191.18,732.59 2205.05,732.59 ccw(c2205.05,814.54) C705.2@2263,756.59
  COMPONENT w8: C707.2@1744.59,580 ccw(c1756.41,591.82) 1756.41,575.11 U701.9@1858.51,575.11
  COMPONENT w19.68: CON701.13@514.89,242 CON701.12@573.94,242 573.94,381.87 cw(c585.1,381.87) CON702.2@577.21,389.76 ; CON702.1@528,389.76 CON702.2@577.21,389.76 ; v5@1169,454 609,454 ccw(c609,422.21) 577.21,422.21 CON702.2@577.21,389.76 ; U702.2@2233.4,920.76 cw(c2169.19,856.54) 2260,856.54 C705.2@2260,756.59
  SIGNAL w6: S701.2@684.42,1256 701.13,1239.29 ccw(c771.84,1310) 771.84,1210 1110.58,1210 cw(c1110.58,1110) 1181.29,1180.71 v1(1256,1106)
  SIGNAL w19.68: v5(1169.59,466) ccw(c1183.59,466) 1183.59,452 1214,452 ccw(c1214,529.25) 1268.63,474.63 1464.45,670.45 cw(c1502,632.89) 1502,686 1530.72,686 ; 1542,683 1581.37,683 cw(c1581.31,663.31) 1594.98,677.48 ccw(c1613,696) 1630.95,677.4 cw(c1644.55,663.17) 1651.2,681.7 ccw(c1660,706) 1669.04,681.79 cw(c1675.83,663.31) 1675.77,683 1677,683 cw(c1677,583) 1777,583 v1(1777,582) ccw(c1777,613) 1808,613 v1(1808,746) 2126.58,746 ccw(c2126.58,846) 2197.29,775.29 v1(2245,823) cw(c2245,780) 2288,780 2288,576.42 cw(c2188,576.42) 2258.71,505.71 v1(2205,452)
VCC5V: C401.2 C402.2 C404.2 C405.2 C407.2 C408.2 C501.2 C502.2 C504.2 C505.2 C508.2 C607.2 C708.2 CON704.3 L601.2 R204.2 R501.1 R603.2 R704.1 U401.1 U402.1 U403.1 U501.3 U502.1 U601.30 U702.3 | length 9352.1
  COMPONENT w6: CON704.3@2322,299 ccw(c2322,334) 2357,334 2357,367.13 cw(c2363,367.1) 2357.13,368.34 ccw(c2348.34,370.27) 2357.34,370.27 2357.34,403.73 ccw(c2348.34,403.73) 2357.13,405.66 cw(c2363,406.9) 2357,406.87 2357,417.59 ccw(c2332.59,417.59) R704.1@2332.59,442
  COMPONENT w7.99: v1(2393,671) 2413.41,671 2418.41,676 2419.41,675 cw(c2419.41,669.41) C607.2@2425,669.41 ; C607.2@2425.91,668.5 U601.30@2509.39,668.5
  COMPONENT w10: v1(2332,479) 2332.59,479 R704.1@2332.59,442 ; C607.2@2425,669.41 ccw(c2425.91,669.41) C607.2@2425.91,668.5 ; v1(2496,441) 2541.59,441 ccw(c2541.59,472.41) R603.2@2573,472.41
  COMPONENT w19.68: U403.1@253.4,250.13 C407.2@318.54,250.13 ; C708.2@2201.59,1073 ccw(c2201.59,1067.41) 2196,1067.41 U702.3@2196,1015.24 ccw(c2208.24,1015.24) 2208.24,1003 v5(2241,1003) ; R204.2@3022.59,1021 3022.59,1137 v5(3069,1137) ; R501.1@3973.41,224 ccw(c3973.41,204.59) 3954,204.59 3954,116 ccw(c3983.12,116) U502.1@3983.12,86.88 ; U502.1@3981.4,86.88 U502.1@3983.12,86.88 ; C505.2@4052,92.52 cw(c4038.39,106.13) C505.2@4038.39,86.88 ; v5@4221,115 cw(c4153.12,182.88) 4188.76,93.74 cw(c4153.12,182.88) 4153.12,86.88 C505.2@4038.39,86.88 ; C405.2@5163.43,194.03 ccw(c5164.88,194.03) C405.2@5163.85,193 ; U502.1@3983.12,86.88 C505.2@4038.39,86.88
  COMPONENT w20: U401.1@4320.6,750.87 4320.6,672.25 ccw(c4332.85,672.25) C402.2@4332.85,660
  COMPONENT w29.53: C407.2@321,252.59 321,321 cw(c402.79,321) 402.79,402.79 464.54,402.79 ccw(c464.54,423.55) 485.3,423.55 485.3,467.27 cw(c538.03,467.27) C408.2@538.03,520 ; v5@493.34,521 v5(496,521) ccw(c498.41,523.41) 498.41,520 C408.2@538.03,520 ; C408.2@529.17,499.33 538.03,508.19 C408.2@538.03,520 ; 3419,959 ccw(c3419,961.18) 3421.18,961.18 C501.2@3421.18,1107 ; C505.2@4052,92.52 C504.2@4110,92.52 C508.2@4168,92.52 4175.11,92.52 ccw(c4175.11,169.27) 4188.76,93.74 ccw(c4175.11,169.27) v5(4229.38,115) ; v5@4221,115 cw(c4225,115) 4225,119 4892.58,119 ccw(c4892.58,219) 4963.29,148.29 4983.3,168.3 cw(c5054.01,97.59) 5054.01,197.59 C404.2@5065,197.59 5118.62,197.59 cw(c5118.62,168.77) C405.2@5139,189.15 ; v5(4282,578) cw(c4290,578) 4290,586 C401.2@4334.41,586 cw(c4334.41,587.56) 4332.85,587.56 C402.2@4332.85,660 ; U402.1@5128.43,269.42 5128.43,214.68 ccw(c5164.53,214.68) C405.2@5139,189.15 ; C405.2@5139,189.15 cw(c5118.62,168.77) 5139,189.15 cw(c5164.53,214.68) C405.2@5139,189.15
  SIGNAL w10: 2036.67,818.74 cw(c2028.62,810.69) 2040,810.69 ; 2383,1011 cw(c2389,1011) 2389,1017 cw(c2384.17,1012.17) 2391,1012.17 ; 2406,1017 ccw(c2422.9,1000.1) 2399,1000.1 2399,677 v1(2393,671) ccw(c2393,610) 2332,610 v1(2332,479) ccw(c2383,479) 2383,428 2485.74,428 ccw(c2485.7,438) 2495.49,435.96 ccw(c2471,441) v1(2496,441)
  SIGNAL w29.53: v5(496,521) 877.58,521 ccw(c877.58,621) 948.29,550.29 1281.1,883.1 1284.71,886.71 cw(c1355.42,816) 1355.42,916 1485.58,916 cw(c1485.58,816) 1556.29,886.71 1598.71,844.29 ccw(c1669.42,915) 1669.42,815 ; 1833,815 1669.42,815 ; v5@3415,993 3415,1073 ccw(c3351,1073) 3351,1137 v5(3069,1137) ccw(c3069,1093.54) 3038.27,1124.27 2960.29,1046.29 cw(c2889.58,1117) 2889.58,1017 2406,1017 2389,1017 2294.42,1017 ccw(c2294.42,917) 2276.65,1015.41 ccw(c2294.42,917) 2223.71,987.71 2080.29,844.29 cw(c2009.58,915) 2068.15,833.95 cw(c2009.58,915) 2036.67,818.74 cw(c2009.58,915) 2009.58,815 1669.42,815 ; v5(3420,993) 3433.71,979.29 cw(c3363,908.58) 3463,908.58 3463,850.47 ccw(c3563,850.47) 3463.03,847.97 ccw(c3563,850.47) 3563,750.47 4182.38,750.47 ; 4184,750.47 4182.38,750.47 ; v5(4229.38,115) 4253.09,138.71 ccw(c4182.38,209.42) 4282.38,209.42 ; 4282.38,329 4282.38,209.42 ; 4182.38,750.47 cw(c4182.38,650.47) 4282.38,650.47 4282.38,209.42
WP: CON201.1 R215.2 U202.7 | length 604
  COMPONENT w6: R215.2@2971.41,1251 2971.41,1252.41 cw(c2999,1252.41) 2999,1280 3079,1280 cw(c3079,1243) 3116,1243 ccw(c3142.72,1243) 3142.72,1216.28 U202.7@3145,1216.28 cw(c3211.72,1216.28) 3211.72,1283 3355,1283 cw(c3355,1201) CON201.1@3437,1201
pads on no net: CON602. CON602.A8 CON602.B8 FID1.0 FID2.0 FID3.0 FID4.0 U201.60 U601.23 U601.24 U601.27

## Polygon pours and split planes (outlines as drawn)
no net on COMPONENT "Component_side_GND" (solid, remove dead copper, pour order 17): 5556.67,11.39 16.67,11.39 16.67,1386.39 16.67,1391.39 5556.67,1396.39
GND on COMPONENT "Component_side_GND" (solid, pour order 0): 15,1400 5555,1400 5555,25 5555,20 15,15
GND on GND1 "Component_side_GND" (solid, remove dead copper, pour order 4): 14.39,1307 5549.7,1307 5555.01,20 15,15
GND on GND2 "Component_side_GND" (solid, remove dead copper, pour order 6): 14.36,1311 5553.39,1311 5555,923 5555,20 15,15
GND on SIGNAL "S" (solid, remove dead copper, pour order 2): 15,1395 5553.27,1395 5555,921 5555,20 15,15

## Other copper
COMPONENT:
  region net SHELD1: 5556,974 5556,1397 5242,1397 5242,974
  rectangle net SHELD1: 2019,1311 5556,1396
  rectangle net SHELD1: 21,1311 1491,1396
  rectangle net SHELD1: 21,1110 426,1396
  pour cut-out: 4015.55,609.91 cw(c4019.01,613.55) 4022.47,617.18 ccw(c4039.7,635.27) 4064.69,635.27 ccw(c4039.7,635.27) 4022.03,617.6 cw(c4018.49,614.06) 4023.5,614.06 cw(c4018.49,614.06) 4014.94,610.51 cw(c4039.7,635.27) 4074.72,635.27 cw(c4039.7,635.27)
  pour cut-out: 4967.85,30.64 cw(c4971.31,34.28) 4974.77,37.91 ccw(c4992,56) 5016.98,56 ccw(c4992,56) 4974.33,38.33 cw(c4970.79,34.79) 4975.8,34.79 cw(c4970.79,34.79) 4967.24,31.24 cw(c4992,56) 5027.02,56 cw(c4992,56)
  pour cut-out: 1910.85,283.64 cw(c1914.31,287.28) 1917.77,290.91 ccw(c1935,309) 1959.99,309 ccw(c1935,309) 1917.33,291.33 cw(c1913.79,287.79) 1918.8,287.79 cw(c1913.79,287.79) 1910.24,284.24 cw(c1935,309) 1970.01,309 cw(c1935,309)
  pour cut-out: 1339.14,1310.93 ccw(c1755,1346) 2171.54,1320.2 ccw(c2089.01,1325.31) 2171.7,1325.31 ccw(c2089.01,1325.31) 2006.47,1330.42 cw(c1755,1346) 1503.94,1324.82 ccw(c1421.54,1317.88)
  pour cut-out: 764.35,513.15 cw(c767.81,516.78) 771.27,520.41 ccw(c788.5,538.5) 813.48,538.5 ccw(c788.5,538.5) 770.83,520.83 cw(c767.29,517.29) 772.3,517.29 cw(c767.29,517.29) 763.74,513.74 cw(c788.5,538.5) 823.51,538.5 cw(c788.5,538.5)
  pour cut-out: -44,1463 -42,1465 436,1465 436,631 -44.97,631
  pour cut-out: 1485,1420 1485,1355.91 1502.5,1272.5 1537.5,1192.5 1585,1145 1625,1120 1680.81,1094.19 1755.91,1085 1825,1094.19 1870,1110 1925,1145 1965,1192.5 1990,1230 2010.4,1279.6 2020,1320 2025,1420
  pour cut-out: 373,1299 373,1417.33 5554.15,1417.33 5554.15,1298.99
  pour cut-out: 5564,964 4576.12,964 4576.12,1368 5564,1368
  pour cut-out: 4080.9,954.96 3495.9,954.96 3495.9,1350.4 4080.9,1350.4
GND2:
  pour cut-out: 1339.14,1310.93 ccw(c1755,1346) 2171.54,1320.2 ccw(c2089.01,1325.31) 2171.7,1325.31 ccw(c2089.01,1325.31) 2006.47,1330.42 cw(c1755,1346) 1503.94,1324.82 ccw(c1421.54,1317.88)
  pour cut-out: 1485,1420 1485,1355.91 1502.5,1272.5 1537.5,1192.5 1585,1145 1625,1120 1680.81,1094.19 1755.91,1085 1825,1094.19 1870,1110 1925,1145 1965,1192.5 1990,1230 2010.4,1279.6 2020,1320 2025,1420
GND1:
  pour cut-out: 1339.14,1310.93 ccw(c1755,1346) 2171.54,1320.2 ccw(c2089.01,1325.31) 2171.7,1325.31 ccw(c2089.01,1325.31) 2006.47,1330.42 cw(c1755,1346) 1503.94,1324.82 ccw(c1421.54,1317.88)
  pour cut-out: 1485,1420 1485,1355.91 1502.5,1272.5 1537.5,1192.5 1585,1145 1625,1120 1680.81,1094.19 1755.91,1085 1825,1094.19 1870,1110 1925,1145 1965,1192.5 1990,1230 2010.4,1279.6 2020,1320 2025,1420
SIGNAL:
  region net SHELD1: 5556,975 5556,1397 4590,1397 4590,975
  region net SHELD1: 4068,967 4068,1397 3507,1397 3507,967
  rectangle net SHELD1: 2019,1311 5556,1396
  rectangle net SHELD1: 21,1311 1488,1396
  rectangle net SHELD1: 21,640 426,1396
  pour cut-out: 1339.14,1310.93 ccw(c1755,1346) 2171.54,1320.2 ccw(c2089.01,1325.31) 2171.7,1325.31 ccw(c2089.01,1325.31) 2006.47,1330.42 cw(c1755,1346) 1503.94,1324.82 ccw(c1421.54,1317.88)
  pour cut-out: 0,1417 2,1419 436,1419 436,631 -0.92,631
  pour cut-out: 417,1299 417,1417.33 5557,1417.33 5557,1299
  pour cut-out: 5564,964 4576.12,964 4576.12,1350.4 5564,1350.4
  pour cut-out: 4081,955 3496,955 3496,1350.4 4081,1350.4
  pour cut-out: 1485,1420 1485,1355.91 1502.5,1272.5 1537.5,1192.5 1585,1145 1625,1120 1680.81,1094.19 1755.91,1085 1825,1094.19 1870,1110 1925,1145 1965,1192.5 1990,1230 2010.4,1279.6 2020,1320 2025,1420

## Silkscreen, mask and mechanical layers (free items; w line width, h text height)
Top Overlay:
  text "DIS WP" at 3228.03,1264 h29.53
  text "5V/VCC" at 2307,224 h29.53 r270
  text "GND" at 2097,219 h29.53 r270
  text "DATA" at 2202,219 h29.53 r270
  text "SHKB" at 4451,101 h275.59
Top Solder:
  drawing of 2 lines, arcs and shapes, not listed
  text "REV C1" at 4438,41 h78.74
Bottom Solder:
  drawing of 2 lines, arcs and shapes, not listed
Outline:
  the board outline again, w0.5

## Dimensions
5569,1418 to 5570.88,0 on PCB dimensions
0,0 to 5570.88,0 on PCB dimensions